# Altium PCB edison_breakout.PcbDoc (part 2 of 2)
Units mil, origin at the board's own origin, x right, y up, seen from the top; angles counter-clockwise.
Board outline 3250 x 2250 mil, 6 copper layers (Top Layer, Signal Layer 1, Signal Layer 3, Signal Layer 4, Signal Layer 2, Bottom Layer), stack 48.468 mil thick; 195 components, 178 nets, 869 pads, 172 vias.
Unrouted connection lines stored in the file: 453.
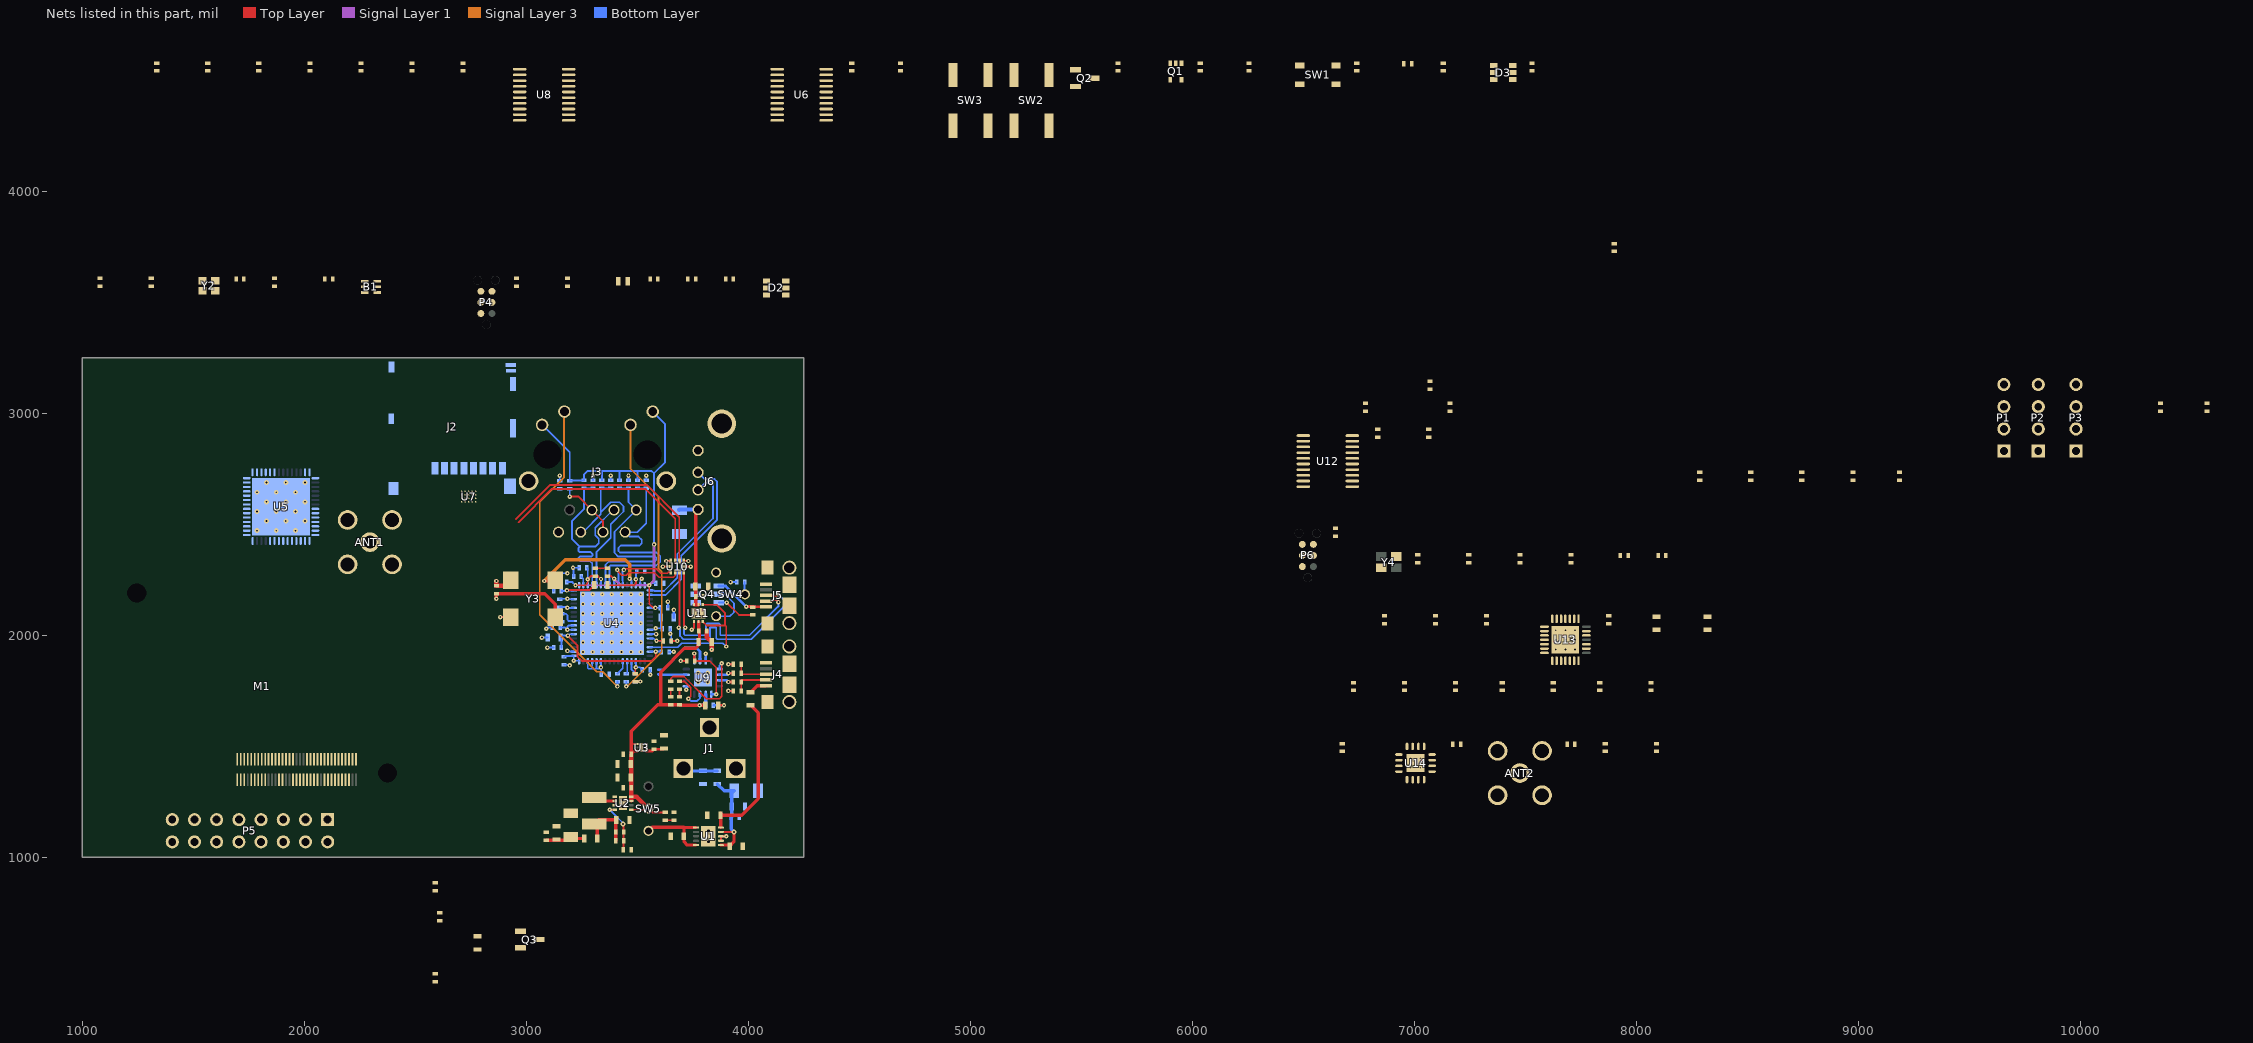
[diagram p4: the nets of this part, all layers, seen from the top]

## Part data
ANT1 ANT2: "CONN SMA JACK STR 50 OHM PCB"
B1: "2.45 GHz Balun for TI CC253X"
C1 C9 C25 C67 C80: library part C_4.7u_10V_0603_ceramic, "Ceramic capacitor, 4.7u, 10V, 0603 package"
C2 C5 C8 C10 C12 C14 C15 C17 C72 C75 C77: library part C_10u_10V_0603_ceramic, "Ceramic capacitor, 10 uF, 10 V, 0603 package"
C3: library part C_10p_50V_0402_ceramic, "Ceramic capacitor, 10 pF, 16 V, 0402 package"
C4 C16 C73: library part C_100u_10V_1206_tantalum, "Tantalum capacitor, 100 uF, 10 V, 1206 package"
C6 C7 C11 C13 C18 C28 C71 C74 C76 C84: library part C_1u_16V_0402_ceramic, "Ceramic capacitor, 1 uF, 16V, 0402 package"
C19 C20 C21 C22 C23 C24 C26 C27 C29 C30 C31 C32 C33 C34 C35 C36 C37 C38 C39 C40 C41 C42 C43 C44 C45 C46 C52 C53 C54 C55 C56 C57 C58 C59 C66 C68 C79 C81 C85 C86 C91: library part C_0.1u_16V_0402_ceramic, "Ceramic capacitor, 0.1u, 16 V, 0402 package"
C47 C48: library part C_22p_0402_ceramic, "Ceramic capacitor, 22 pF, 0402 package"
C49 C83: library part C_1000p_50V_0402_ceramic, "Ceramic capacitor, 1000 pF, 0402 package"
C50 C51 C82: library part C_12p_0402_ceramic, "Ceramic capacitor, 12 pF, 0402 package"
C60: library part C_10000p_16V_0402_ceramic, "Ceramic capacitor, 10000 pF, 16 V, 0402 package"
C61: library part C_0.022u_50V_0402_ceramic, "Ceramic capacitor, 0.022 uF, 0402 package"
C62 C63 C64 C65 C92 C93: library part C_15p_25V_0402_ceramic, "Ceramic capacitor, 15 pF, 25V, 0402 package"
C69 C70: library part C_47p_50V_0402_ceramic, "Ceramic capacitor, 47 pF, 0402 package"
C78: library part C_220p_50V_0402_ceramic, "Ceramic capacitor, 220 pF, 0402 package"
C87: library part C_18p_50V_0402_ceramic, "Ceramic capacitor, 18 pF, 0402 package"
C88 C89: library part C_2.2p_50V_0402_ceramic, "Ceramic capacitor, 2.2 pF, 0402 package"
C90: library part C_0.2p_50V_0402_ceramic, "Ceramic capacitor, 0.2 pF, 0402 package"
D1: library part D_LED_BLUE_0402, "LED, Blue, 0402"
D2 D3: library part D_CLY6D-FKC, "CREE PLCC6 3 in 1 SMD LED"
D4: library part D_LED_ORANGE_0402, "LED, Orange, 0402"
D5: library part D_LED_GREEN_0402, "LED, Green,  0402"
D6: library part D_LED_RED_0402, "LED, Red, 0402"
FB1 FB2 FB3 FB4 FB5 FB6: library part FB_2A_0603, "Ferrite Bead, 2 A, 0603 package"
J1: "CONN PWR JACK 2.1X5.5MM HIGH CUR"
J2: "Micro SD Slot"
J3: "1x1 Tab-Down RJ45"
J4 J5: library part "Micro USB", "CONN USB MICRO B RECPT SMT R/A"
J6: library part A105221-ND, "USB 2.0 Type A"
L1: library part L_1u_LQM32PN, "Chip inductor, 1 uH, 1210 package, LQM32PN"
L2: library part L_4.7n_300mA_0402, "Chip inductor, 4.7 nH, 0402 package, 300 mA"
L3: library part L_6.8n_0402, "Chip inductor, 6.8 nH, 0402 package"
L4: library part L_1n_300mA_0402, "Chip inductor, 1 nH, 0402 package, 300 mA"
L5: library part L_2n_300mA_0402, "Chip inductor, 2 nH, 0402 package, 300 mA"
P1 P2 P3 P5: "100 mils standard header"
P4 P6: "TC2030-MCP-NL"
Q1: "Common Source Dual N-Channel MOSFET"
Q2 Q3: "N-Channel 20 V (D-S) MOSFET"
Q4: "Load Switch"
R1 R5 R13 R15 R34: library part R_200_0402, "Chip resistor, 200, 0402 package"
R2: library part R_680K_0402, "Chip resistor, 680K, 0402 package"
R3: library part R_120K_0402, "Chip resistor, 120K, 0402 package"
R4 R12: library part R_100_0402, "Chip resistor, 100, 0402 package"
R6 R14 R25 R27 R28: library part R_330_0402, "Chip resistor, 330, 0402 package"
R7: library part R_2.2K_0402, "Chip resistor, 2.2K, 0402 package"
R8 R42: library part R_56K_0402, "Chip resistor, 56K, 0402 package"
R9 R10 R11 R16 R17 R19 R26 R33 R35 R36 R38 R39 R40: library part R_10K_0402, "Chip resistor, 10K, 0402 package"
R18: library part R_12.4K_0402, "Chip resistor, 12.4K, 0402 package"
R20 R21 R22 R23: library part R_49.9_0402, "Chip resistor, 49.9, 0402 package"
R24: library part R_10_0402, "Chip resistor, 10, 0402 package"
R29 R32: library part R_27_0402, "Chip resistor, 27, 0402 package"
R30: library part R_470_0402, "Chip resistor, 470, 0402 package"
R31: library part R_750_0402, "Chip resistor, 750, 0402 package"
R37: library part R_12K_0402, "Chip resistor, 12K, 0402 package"
R41: library part R_3.9K_0402, "Chip resistor, 3.9K, 0402 package"
SW1: "Tactile Switches"
SW2 SW3: "Tactile SPST Switch"
SW4: "SPST Slide switch"
SW5: "Slide switch, SPDT, 500 mA, 12 V"
U1: "Dual 2.6A, 2.5V to 5.5V,  Ideal Diodes in 3mm ⊙ 3mm DFN"
U2: "3-MHz, 2-A, Step-Down Converter"
U3: "Fast Transient Response  Low Voltage 500 mA LDO"
U4: "USB 2.0 Hub and 10/100  Ethernet Controller"
U5: "A Powerful System-On-Chip for 2.4-GHz IEEE 802.15.4, 6LoWPAN  and ZigBee Applications"
U6 U8 U12: "TXS0108E-Q1 8-Bit Bi-directional, Level-Shifting, Voltage Translator  for Open-Drain and Push-Pull Applications"
U7: "SD CARD VOLTAGE-TRANSLATION TRANSCEIVER"
U9: "FT230X USB UART"
U10: "High-Speed USB 2.0 (480-Mbps) 1:2 Multiplexer ¡V Demultiplexer  Switch With Single Enable"
U11: "0.5A SINGLE CHANNEL CURRENT-LIMITED  POWER SWITCH WITH OUTPUT DISCHARGE"
U13: "2.4 GHZ IEEE 802.15.4/ZIGBEER RF TRANSCEIVER"
U14: "2.4-GHz Range Extender"
Y1: "32768 Hz SMD Low profile crystal"
Y2: "MHz Range Crystal Unit"
Y3: "HCMOS/TTL Clock Oscillator"
Y4: "Crystal 32.0000MHz 10ppm 10pF 50 Ohm"

## Via types
v1: diameter 20, hole 8, Top Layer to Bottom Layer, 78 vias
v2: diameter 19.68, hole 7.87, Top Layer to Bottom Layer, 66 vias
v3: diameter 22, hole 8, Top Layer to Bottom Layer, 21 vias
v4: diameter 150, hole 125, Top Layer to Bottom Layer, 4 vias
v5: diameter 24, hole 12, Top Layer to Bottom Layer, 3 vias

## Nets (pads, with @x,y where several pads share a name; then routed paths per layer and width w, separated by ;. In a path a pad name is that pad's centre, name@x,y a point inside that pad or via, vN(x,y) a via of type N, cw(c..) or ccw(c..) an arc to the next point about the centre after c; other vN are vias at no path point)
BLD_CTRL: P4.5 U5.18
BLD_RX: P4.4 U5.16
BLD_TX: P4.3 U5.17
CC2520_RF_N: L3.1 U13.19 U14.2
CC2520_RF_P: L3.2 U13.17 U14.3
CC2538_PA3: P5.7 U5.19
CC2538_PA4: P5.9 U5.20
CC2538_PA5: P5.11 U5.21
CC2538_PA6: P5.13 U5.22
CC2538_PA7: P5.15 U5.23
CC2538_R\E\S\E\T\: P4.6 P6.3 R7.2
CC2538_RF_N: B1.3 U5.38
CC2538_RF_P: B1.4 U5.37
CC2538_TCK: P6.4 U5.47
CC2538_TDO: P6.6 U5.48
CC2538_TMS: P6.2 U5.46
EDISON_CLK: M1.55 U8.4
EDISON_CLK_3V3: P5.6 U5.12 U8.17 U13.28
EDISON_CS0: M1.53 U8.5
EDISON_CS0_3V3: U5.11 U8.16
EDISON_CS1: M1.51 U6.1
EDISON_CS1_3V3: P5.8 U6.20 U13.3
EDISON_GP14: M1.48 U8.7
EDISON_GP14_3V3: U5.8 U8.14
EDISON_GP15: M1.42
EDISON_GP19: M1.41 U12.3
EDISON_GP20: M1.43 U12.1
EDISON_GP41: M1.54 U12.4
EDISON_GP43: M1.56 U12.5
EDISON_GP44: M1.24 U8.6
EDISON_GP44_3V3: U5.9 U8.15
EDISON_GP45: M1.26 U6.7
EDISON_GP45_3V3: P5.1 U6.14
EDISON_GP46: M1.28 U6.8
EDISON_GP46_3V3: P5.3 U6.13
EDISON_GP47: M1.30 U6.9
EDISON_GP47_3V3: P5.5 U6.12
EDISON_GP48: M1.32 U12.7
EDISON_GP49: M1.34 U12.8
EDISON_GP165: M1.25
EDISON_GP183: M1.39 U12.6
EDISON_I2C_SCL: M1.45 U6.4
EDISON_I2C_SCL_3V3: P5.12 R17.2 U6.17
EDISON_I2C_SDA: M1.47 U6.3
EDISON_I2C_SDA_3V3: P5.10 R16.2 U6.18
EDISON_MISO: M1.59 U8.1
EDISON_MISO_3V3: P5.2 U5.14 U8.20 U13.1
EDISON_MOSI: M1.57 U8.3
EDISON_MOSI_3V3: P5.4 U5.13 U8.18 U13.2
EDISON_SD_C\D\: J2.9 M1.60 U7.B2
EDISON_SD_CLK: M1.58 U7.D2
EDISON_SD_CLK_FB: M1.44 U7.E2
EDISON_SD_CMD: M1.62 U7.C1
EDISON_SD_DAT0: M1.66 U7.D1
EDISON_SD_DAT1: M1.70 U7.E1
EDISON_SD_DAT2: M1.64 U7.A1
EDISON_SD_DAT3: M1.68 U7.B1
EDISON_SW1: M1.50 R9.2 SW2.1 SW2.3
EDISON_SW2: M1.52 R10.2 SW3.1 SW3.3
EDISON_UART_CTS: M1.65
EDISON_UART_RTS: M1.63
EDISON_UART_RX: M1.61 U6.6
EDISON_UART_RX_3V3: P5.16 U6.15
EDISON_UART_TX: M1.46 U6.5
EDISON_UART_TX_3V3: P5.14 U6.16
GND: ANT1.1 ANT2.1 B1.2 B1.5 B1.6 C1.2 C2.2 C4.2 C5.2 C6.2 C7.2 C8.2 C9.2 C10.2 C11.2 C12.2 C13.2 C14.2 C15.2 C16.2 C17.2 C18.2 C19.2 C20.2 C21.2 C22.2 C23.2 C24.2 C25.2 C26.2 C27.2 C28.2 C29.2 C30.2 C31.2 C32.2 C33.2 C34.2 C35.2 C36.2 C37.2 C38.2 C39.2 C40.2 C41.2 C42.2 C43.2 C44.2 C45.2 C46.2 C47.2 C48.2 C49.2 C50.1 C51.1 C52.2 C53.2 C54.2 C55.2 C56.2 C57.2 C58.2 C59.2 C60.2 C61.2 C62.2 C63.2 C64.2 C65.2 C66.2 C67.2 C68.2 C69.2 C70.2 C71.2 C72.2 C73.2 C74.2 C75.2 C76.2 C77.2 C78.2 C79.2 C80.2 C81.2 C82.2 C83.2 C84.2 C85.2 C86.2 C88.2 C89.2 C90.2 C91.2 C92.2 C93.2 D1.2 J1.2 J1.3 J2.6 J2.10 J2.11 J2.12 J2.13 J2.14 J2.15 J2.16 J3.8 J3.13 J3.14 J4.5 J4.6 J5.5 J5.6 J6.4 J6.5 J6.6 M1.1 M1.5 M1.9 M1.11 M1.13 M1.15 P3.1 P3.2 P3.3 P3.4 P4.2 P6.5 Q1.4 Q2.2 Q3.2 Q4.1 R3.2 R8.2 R18.1 R33.2 R36.2 R37.2 R41.2 R42.2 SW1.3 SW1.4 SW2.2 SW2.4 SW3.2 SW3.4 U1.2 U1.3 U1.11 U2.1 U2.3 U2.9 U3.3 U3.7 U4.34 U4.44 U4.65 U5.1 U5.57 U6.11 U7.C2 U7.C3 U8.8 U8.9 U8.11 U8.12 U8.13 U9.3 U9.13 U9.17 U10.5 U10.6 U11.1 U11.7 U12.9 U12.11 U12.12 U13.29 U14.1 U14.4 U14.9 U14.11 U14.12 U14.16 U14.17 Y2.2 Y2.4 Y3.2 | length 1479
  Top Layer w8: C41.2@3310,2302.72 3336.1,2302.72 ; 3335,2301.61 3336.1,2302.72 ; C45.2@3365,2302.72 3336.1,2302.72 ; v1(3745,2025) 3755.32,2035.32 U11.1@3755.32,2061.61
  Top Layer w10: v1(3695,1885) C66.2@3722.28,1885 ; U10.6@3709.53,2335 v1(3730,2335) ; U10.5@3713.86,2310 v1(3740,2310) ; C67.2@3864.53,1685 v1(3890,1685) ; U1.2@3876.1,1075.31 U1.3@3876.1,1095 v1(3900,1095) ; v1(3910,1750) C69.2@3932.28,1750 ; v1(3910,1870) C70.2@3932.28,1870
  Top Layer w15: v1(2865,2165) C59.2@2865,2187.28 3082.72,2187.28 3130,2140 Y3.2@3130,2082.32
  Top Layer w20: C74.2@3812.72,2020 3812.72,1991.81 C75.2@3834.53,1970 v1(3834.53,1935.47)
  Bottom Layer w8: v1(3070,1990) C25.2@3095.47,1990 ; v1(3090,2030) 3095,2035 C36.2@3117.28,2035 ; v1(3095,1945) C26.2@3122.28,1945 ; C29.2@3122.28,2200 3122.28,2215 C43.2@3147.28,2240 3147.28,2262.28 3165,2280 v1(3185,2280) ; C37.2@3150,2127.28 3182.72,2127.28 v1(3185,2125) 3186.1,2123.9 U4.44@3213.74,2123.9 ; C61.2@3150,2695.43 v1(3150,2720) ; C35.2@3170,1867.28 3192.72,1867.28 v1(3195,1865) ; v1(3185,1930) 3187.95,1927.05 U4.34@3213.74,1927.05 ; R18.1@3212.28,2265 3212.28,2302.72 v1(3210,2305) C44.2@3237.28,2305 ; C64.2@3300,2697.72 v1(3300,2720) ; C65.2@3380,2697.72 v1(3380,2720) ; C62.2@3460,2697.72 v1(3460,2720) ; C63.2@3540,2697.72 v1(3540,2720) ; v1(3557.72,1822.28) C33.2@3557.72,1845 ; C39.2@3637.72,2125 v1(3637.72,2152.28) ; C27.2@3642.72,1925 3661.77,1925 v1(3663.38,1926.62) v1@3666.62,1926.62 ; C40.2@3647.72,2030 v1(3647.72,2007.28) 3652.72,2002.28 C60.2@3652.72,1975
  Bottom Layer w10: v1(3720.2,1755.2) U9.13@3720.2,1771.61 ; Q4.1@3760,2144.17 Q4.1@3763.43,2147.6 ; U9.3@3807.8,1884.8 v1(3807.8,1917.8) ; C68.2@3842.72,1685 v1(3890,1685)
  other v2: 6983.35,1403.35 7026.65,1403.35 6983.35,1446.65 7026.65,1446.65 3773.35,1788.35 3816.65,1788.35 3773.35,1831.65 3816.65,1831.65 3255.08,1925.08 3298.39,1925.08 3341.69,1925.08 3385,1925.08 3428.31,1925.08 3471.61,1925.08 3514.92,1925.08 7636.69,1936.69 7680,1936.69 7723.31,1936.69 3255.08,1968.39 3298.39,1968.39 3341.69,1968.39 3385,1968.39 3428.31,1968.39 3471.61,1968.39 3514.92,1968.39 7636.69,1980 7680,1980 7723.31,1980 3255.08,2011.69 3298.39,2011.69 3341.69,2011.69 3385,2011.69 3428.31,2011.69 3471.61,2011.69 3514.92,2011.69 7636.69,2023.31 7680,2023.31 7723.31,2023.31 3255.08,2055 3298.39,2055 3341.69,2055 3385,2055 3428.31,2055 3471.61,2055 3514.92,2055 3255.08,2098.31 3298.39,2098.31 3341.69,2098.31 3385,2098.31 3428.31,2098.31 3471.61,2098.31 3514.92,2098.31 3255.08,2141.61 3298.39,2141.61 3341.69,2141.61 3385,2141.61 3428.31,2141.61 3471.61,2141.61 3514.92,2141.61 3255.08,2184.92 3298.39,2184.92 3341.69,2184.92 3385,2184.92 3428.31,2184.92 3471.61,2184.92 3514.92,2184.92
  other v3: 1786.73,2471.73 1873.35,2471.73 1959.96,2471.73 1830.04,2515.04 1916.65,2515.04 2003.27,2515.04 1786.73,2558.35 1873.35,2558.35 1959.96,2558.35 1830.04,2601.65 1916.65,2601.65 2003.27,2601.65 1786.73,2644.96 1873.35,2644.96 1959.96,2644.96 1830.04,2688.27 1916.65,2688.27 2003.27,2688.27
  other v5: 3820,1070 3820,1120 3775,2100
L\N\K\A\: R27.1 U4.21 | length 57.6
  Bottom Layer w8: R27.1@3450,1827.72 3453.9,1831.61 U4.21@3453.9,1883.74
LNA_EN: R39.1 U12.18 U13.5
NetANT1_2: ANT1.2 B1.1
NetANT2_2: ANT2.2 C87.2
NetC2_1: C2.1 C3.1 FB1.2 L1.1 R2.1 | length 250
  Top Layer w15: L1.1@3306,1149.96 3325.29,1169.25 C2.1@3405.47,1169.25 ; FB1.2@3319.53,1085 L1.1@3319.53,1136.43 ; C3.1@3402.28,1075 R2.1@3402.28,1115 C2.1@3402.28,1166.06
NetC3_2: C3.2 R2.2 R3.1 U2.4 | length 227.9
  Top Layer w8: v3(3375.28,1214.72) U2.4@3397.6,1214.72 ; v3(3435,1150) 3437.72,1147.28 R2.2@3437.72,1115 C3.2@3437.72,1075 R3.1@3437.72,1035
  Bottom Layer w8: v3(3375.28,1214.72) 3435,1155 v3(3435,1150)
NetC15_1: C15.1 FB2.2 J1.1 | length 157.4
  Bottom Layer w15: J1.1@3706.89,1400 3717.36,1389.53 C15.1@3795,1389.53 FB2.2@3860,1389.53
NetC19_1: C19.1 C20.1 U5.32 U5.56
NetC47_1: C47.1 U5.45 Y1.2
NetC48_1: C48.1 U5.44 Y1.1
NetC49_1: C49.1 R7.1 U5.28
NetC50_2: C50.2 U5.34 Y2.1
NetC51_2: C51.2 U5.35 Y2.3
NetC60_1: C60.1 R26.2 U4.12 | length 97.7
  Top Layer w8: v1(3586.18,1976.18) 3616.11,1976.18 R26.2@3617.28,1975
  Bottom Layer w8: U4.12@3556.57,1985.79 U4.12@3556.26,1986.1 3573.9,1986.1 3583.82,1976.18 v1(3586.18,1976.18) 3616.11,1976.18 C60.1@3617.28,1975
NetC61_1: C61.1 J3.4 J3.5 R24.2 | length 328.8
  Top Layer w8: v1(3195,2625) 3235,2625 J3.5@3295,2565 3345,2515 J3.4@3345,2465
  Bottom Layer w8: C61.1@3152.28,2657.72 C61.1@3150,2660 R24.2@3195,2660 v1(3195,2625)
NetC69_1: C69.1 J4.2 R29.1 | length 161.4
  Top Layer w8: C69.1@3967.72,1750 R29.1@3967.72,1790 3967.72,1799.41 J4.2@4079.68,1799.41
NetC70_1: C70.1 J4.3 R32.1 | length 157
  Top Layer w8: C70.1@3967.72,1870 R32.1@3967.72,1830 3967.72,1825 J4.3@4079.68,1825
NetC87_1: C87.1 C90.1 L5.1
NetC88_1: C88.1 L2.2 L4.2 U14.10
NetC89_1: C89.1 L4.1 L5.2
NetC91_1: C91.1 U13.27
NetC92_1: C92.1 U13.12 Y4.1
NetC93_1: C93.1 U13.13 Y4.3
NetD1_1: D1.1 R1.2 | length 40
  Top Layer w8: R1.2@3625,1167.28 D1.1@3665,1167.28
NetD2_1: D2.1 R4.1
NetD2_2: D2.2 R5.1
NetD2_3: D2.3 R6.2
NetD3_1: D3.1 Q1.2
NetD3_2: D3.2 Q1.1
NetD3_3: D3.3 Q2.3
NetD3_4: D3.4 R14.1
NetD3_5: D3.5 R13.1
NetD3_6: D3.6 R12.1
NetD4_2: D4.2 R25.1 | length 45.4
  Top Layer w8: D4.2@3490,1792.28 v1(3512.72,1792.28)
  Bottom Layer w8: R25.1@3490,1792.28 v1(3512.72,1792.28)
NetD5_1: D5.1 R30.2 | length 34.6
  Top Layer w8: R30.2@3690,1722.72 D5.1@3690,1757.28
NetD5_2: D5.2 U9.11 | length 194.5
  Top Layer w8: D5.2@3690,1792.72 3711.16,1792.72 3740.2,1763.68 3740.2,1725.2 v1(3730,1715)
  Bottom Layer w8: v1(3730,1715) 3740,1705 3770,1705 3782.2,1717.2 U9.11@3782.2,1735.2
NetD6_1: D6.1 R31.2 | length 34.6
  Top Layer w8: R31.2@3650,1722.72 D6.1@3650,1757.28
NetD6_2: D6.2 U9.5 | length 472.8
  Top Layer w8: D6.2@3650,1792.72 3650,1805 3660,1815 3710,1815 3810,1715 3870,1715 3880,1725 v1(3880,1875)
  Bottom Layer w8: U9.5@3869.8,1848.39 3869.8,1864.8 v1(3880,1875)
NetFB5_2: FB5.2 J4.1 | length 81.8
  Top Layer w15: FB5.2@4010,1744.53 4039.29,1773.82 J4.1@4079.68,1773.82
NetJ2_1: J2.1 U7.A4
NetJ2_2: J2.2 U7.B4
NetJ2_3: J2.3 U7.C4
NetJ2_5: J2.5 U7.D3
NetJ2_7: J2.7 U7.D4
NetJ2_8: J2.8 U7.E4
NetJ3_10: J3.10 R27.2 | length 1327.5
  Signal Layer 3 w8: v1(3450,1770) 3454.19,1770 3610,1925.81 3610,2286.72 3595,2301.72 3595,2625 3469.02,2750.98 J3.10@3469.02,2948.07
  Bottom Layer w8: v1(3450,1770) R27.2@3450,1792.28
NetJ3_11: J3.11 R28.2 | length 1467.5
  Signal Layer 3 w8: J3.11@3170.98,3007.91 3170,3006.93 3170,2711.72 3060,2601.72 3060,2092.1 3316.31,1835.79 3344.21,1835.79 v1(3410,1770)
  Bottom Layer w8: v1(3410,1770) R28.2@3410,1792.28
NetJ5_1: J5.1 Q4.4 R35.2 | length 251.9
  Top Layer w12: v1(3990,2130) 4025,2130 4026.18,2128.82 J5.1@4079.68,2128.82
  Bottom Layer w12: Q4.4@3866.57,2222.4 3897.6,2222.4 v1(3990,2130)
NetL1_2: L1.2 U2.2 | length 98.2
  Top Layer w15: L1.2@3306,1270.04 3321.94,1254.09 U2.2@3397.6,1254.09
NetM1_3: M1.3 Q3.3
NetM1_17: M1.17 R15.1
NetM1_20: M1.20 Q4.2 Q4.3
NetM1_22: M1.22 U9.15 | length 126.1
  Bottom Layer w12: 3595,1825 3597.2,1822.8 U9.15@3720.2,1822.8
NetM1_27: M1.27 U9.2 | length 278.7
  Bottom Layer w12: 3595,1845 3615,1845 3715,1945 3765,1945 3782.2,1927.8 U9.2@3782.2,1884.8
NetM1_33: M1.33 Q1.5
NetM1_35: M1.35 Q1.3
NetM1_37: M1.37 Q2.1
NetQ3_1: Q3.1 R33.1 SW4.2
NetQ4_6: Q4.6 R35.1 | length 176.3
  Top Layer w8: v1(3902.4,2147.6) 3957.72,2092.28 R35.1@4020,2092.28
  Bottom Layer w8: Q4.6@3866.57,2147.6 v1(3902.4,2147.6)
NetR4_2: R4.2 U5.29
NetR5_2: R5.2 U5.30
NetR6_1: R6.1 U5.31
NetR8_1: R8.1 U5.42
NetR11_2: R11.2 R15.2 SW1.1 SW1.2
NetR18_2: R18.2 U4.50 | length 42.6
  Bottom Layer w8: R18.2@3247.72,2265 3256.42,2256.3 3256.42,2226.89 U4.50@3257.05,2226.26
NetR19_2: R19.2 U4.41 | length 79.1
  Bottom Layer w8: R19.2@3160,2097.72 3177.28,2097.72 3185,2090 3185,2070 3190.16,2064.84 U4.41@3213.74,2064.84
NetR25_2: R25.2 U4.20 | length 63.1
  Bottom Layer w8: U4.20@3473.58,1883.74 3473.27,1883.43 3473.27,1848.13 3490,1831.4 R25.2@3490,1827.72
NetR29_2: R29.2 U9.7 | length 65.5
  Top Layer w12: v1(3910,1790) R29.2@3932.28,1790
  Bottom Layer w12: U9.7@3869.8,1797.2 3902.8,1797.2 v1(3910,1790)
NetR32_2: R32.2 U9.6 | length 65.5
  Top Layer w12: v1(3910,1830) R32.2@3932.28,1830
  Bottom Layer w12: U9.6@3869.8,1822.8 3902.8,1822.8 v1(3910,1830)
NetR34_1: R34.1 SW4.C | length 55.9
  Bottom Layer w8: R34.1@3982.72,2240 3982.72,2187.24 SW4.C@3984.96,2185
NetR37_1: R37.1 U4.63 | length 31.7
  Bottom Layer w8: U4.63@3512.95,2226.26 3513.27,2226.57 3513.27,2248.27 v1(3520,2255)
NetR38_2: R38.2 U14.5
NetR39_2: R39.2 U14.6
NetR40_2: R40.2 U14.7
NetR41_1: R41.1 U14.8
NetR42_1: R42.1 U13.23
NetU4_61: U4.61 Y3.3 | length 581
  Top Layer w15: v1(3080,2245) 3127.32,2245 Y3.3@3130,2247.68
  Signal Layer 3 w15: v1(3080,2245) 3175,2340 3445,2340 3465,2320 v1(3465,2255)
  Bottom Layer w8: v1(3465,2255) 3473.27,2246.73 3473.27,2226.57 U4.61@3473.58,2226.26
NetU12_13: U12.13 U13.25
NetU12_14: U12.14 U13.10
NetU12_15: U12.15 U13.9
NetU12_16: U12.16 U13.7
NetU12_17: U12.17 U13.6
PA_EN: R38.1 U12.20 U13.4
RX_N: C65.1 J3.6 R23.2 U4.53 | length 827.5
  Bottom Layer w8: J3.6@3245,2465 3255,2465 3335,2545 ; U4.53@3316.1,2226.26 3316.1,2374.42 3315.26,2375.26 3379.8,2439.8 3379.8,2500.58 3437.46,2558.24 3437.46,2582 3419.46,2600 3380.78,2600 3335,2554.22 3335,2545 ; C65.1@3380,2662.72 3340.43,2662.72 R23.2@3340,2662.28 3335,2657.28 3335,2545
RX_P: C64.1 J3.3 R22.2 U4.52 | length 965.2
  Bottom Layer w8: U4.52@3296.42,2226.26 3296.42,2324.16 3285.57,2335 3240,2335 3235,2340 3235,2350 3240,2355 3292.26,2355 3297.26,2360 3297.26,2367.74 3290,2375 3240,2375 3235,2380 3235,2395 3240,2400 ; C64.1@3300,2662.72 3260.43,2662.72 R22.2@3260,2662.28 3260,2570 3205,2515 3205,2435 3240,2400 ; J3.3@3395,2565 3390,2565 3310.2,2485.2 3310.2,2450.58 3325.78,2435 3325.78,2415.78 3310,2400 3240,2400
S\P\D\: R28.1 U4.22 | length 66.1
  Bottom Layer w8: R28.1@3410,1827.72 3434.21,1851.93 U4.22@3434.21,1883.74
TX_N: C63.1 J3.2 R21.2 U4.56 | length 1086.6
  Bottom Layer w8: U4.56@3375.16,2226.26 3375.16,2245.02 3374.32,2245.87 3374.32,2310 3379.32,2315 3585.46,2315 3603,2332.54 3603,2357.46 3587.46,2373 3422,2373 3415,2380 3415,2395 3425,2405 3510,2405 3520,2415 3520,2430 3505,2445 3465,2445 J3.2@3445,2465 3500,2465 3540,2505 C63.1@3540,2662.28 C63.1@3539.57,2662.28 ; R21.2@3500,2662.28 C63.1@3539.57,2662.28 ; C63.1@3540,2662.72 C63.1@3539.57,2662.28
TX_P: C62.1 J3.1 R20.2 U4.55 | length 922.5
  Bottom Layer w8: U4.55@3355.47,2226.26 3355.47,2245.02 3356.32,2245.87 3356.32,2317.46 3371.86,2333 3578,2333 3585,2340 3585,2350 3580,2355 3414.54,2355 3397,2372.54 3397,2467 J3.1@3495,2565 3460,2600 3460,2661.85 C62.1@3459.57,2662.28 ; R20.2@3420,2662.28 C62.1@3459.57,2662.28 ; C62.1@3460,2662.28 C62.1@3459.57,2662.28 ; C62.1@3460,2662.72 C62.1@3459.57,2662.28
USB2_PWR: C73.1 C76.1 C77.1 J6.1 U11.5 U11.6 | length 547.7
  Top Layer w15: J6.1@3773.31,2567.05 3759.53,2553.27 3763.5,2549.3 3763.5,2223.97 3759.53,2220 3762.72,2216.81 3762.72,2170 3762.72,2145.79 U11.6@3755.32,2138.39 U11.5@3775,2138.39
  Bottom Layer w20: C73.1@3688.15,2565 3690.2,2567.05 J6.1@3773.31,2567.05
USB2_PWR_EN: U4.14 U11.3 U11.4 | length 733.2
  Top Layer w8: U11.3@3794.68,2061.61 3811.3,2045 3895,2045 ; U11.4@3794.68,2138.39 3856.61,2138.39 3895,2100 3895,2045 ; v1(3900,1950) 3900,2040 3895,2045
  Bottom Layer w8: U4.14@3556.26,1946.73 3556.26,1947.05 3682.05,1947.05 3700,1965 3885,1965 v1(3900,1950)
USB_DOWNSTREAM_N: J6.2 U4.1 | length 721.2
  Bottom Layer w8: U4.1@3556.26,2202.64 3575.02,2202.64 3577.66,2200 3620,2200 3680,2260 3680,2366.41 3840,2526.41 3840,2686 3803.68,2686 J6.2@3773.31,2655.63
USB_DOWNSTREAM_P: J6.3 U4.2 | length 780.2
  Bottom Layer w8: U4.2@3556.26,2182.95 3569.25,2182.95 3570.21,2182 3627.46,2182 3698,2252.54 3698,2358.96 3858,2518.96 3858,2693.46 3847.46,2704 3803.68,2704 J6.3@3773.31,2734.37
USB_EDISON_N: M1.18 U10.7 | length 1059.1
  Top Layer w8: 2952.27,2522.73 3107.54,2678 3543.46,2678 3689,2532.46 3689,2351.26 3689.84,2350.42 U10.7@3689.84,2335
USB_EDISON_P: M1.16 U10.8 | length 1014.4
  Top Layer w8: 2965,2510 3115,2660 3536,2660 3671,2525 3671,2351.26 3670.16,2350.42 U10.8@3670.16,2335
USB_MASTER/SLAVE_SEL: Q4.5 R36.1 SW4.1 U10.9 | length 240.1
  Top Layer w8: v1(3630,2335) U10.9@3650.47,2335
  Bottom Layer w8: v1(3630,2335) v1@3635,2330 ; SW4.1@3855.04,2086.57 3916.57,2086.57 3935,2105 3935,2145 3895,2185 Q4.5@3866.57,2185
USB_SLAVE_N: J5.2 U10.4 | length 952.2
  Top Layer w8: U10.4@3709.53,2285 3709.53,2045.41 3716,2038.94 v1(3716,2035) ; J5.2@4079.68,2154.41 4110.26,2154.41 4114.06,2158.2 4126.8,2158.2 v1(4135,2150) v1@4135,2155
  Bottom Layer w8: v1(3716,2035) 3710,2029 3710,2005 3714.77,2000.23 3809,2000.23 3809,2048.67 3814.27,2053.94 3867.73,2053.94 3873,2048.67 3873,2000.23 4004.77,2000.23 4135,2130.46 v1(4135,2150)
USB_SLAVE_P: J5.3 U10.3 | length 1053.4
  Top Layer w8: v1(3686,2035) 3689.84,2038.84 U10.3@3689.84,2285 ; J5.3@4079.68,2180 4110.26,2180 4114.06,2176.2 4126.2,2176.2 v1(4135,2185)
  Bottom Layer w8: v1(3686,2035) 3692,2029 3692,1997.54 3707.32,1982.23 3714.77,1982.23 3821.73,1982.23 3827,1987.5 3827,2035.94 3855,2035.94 3855,1987.5 3860.27,1982.23 4012.23,1982.23 4159,2129 4159,2159.94 4135,2183.94 v1(4135,2185)
USB_UPSTREAM_N: U4.58 U10.2 | length 376.2
  Top Layer w8: v1(3409.37,2295) 3409.37,2291.06 3429.43,2271 3449.31,2271 3460.58,2282.27 3577.27,2282.27 3597.54,2262 3635.57,2262 3662.57,2262 3670.16,2269.58 U10.2@3670.16,2285
  Bottom Layer w8: v1(3409.37,2295) 3415.37,2289 3415.37,2245.87 3414.53,2245.02 U4.58@3414.53,2226.26
USB_UPSTREAM_P: U4.59 U10.1 | length 295.3
  Top Layer w8: v1(3439.37,2295) 3444.64,2300.27 3460.58,2300.27 3584.73,2300.27 3605,2280 3635.57,2280 3640.57,2285 U10.1@3650.47,2285
  Bottom Layer w8: U4.59@3434.21,2226.26 3434.21,2245.02 3433.37,2245.87 3433.37,2289 v1(3439.37,2295)
V_ORED: C10.1 SW5.3 U1.6 U1.10 | length 344.5
  Top Layer w15: SW5.3@3550,1120 3565.47,1135.47 3710,1135.47 3710,1070 3724.37,1055.63 U1.10@3763.9,1055.63 ; 3711.1,1134.37 U1.6@3763.9,1134.37
VCC1.8_EDISON: C38.1 C52.1 C53.1 C54.1 C66.1 M1.12 P1.3 P1.4 R9.1 R10.1 U6.2 U6.10 U7.A2 U7.E3 U8.2 U8.10 U9.1 U9.9 U12.2 U12.10 | length 318.3
  Top Layer w8: C66.1@3757.72,1885 3825,1885 3854.8,1855.2 v1(3854.8,1735.2)
  Top Layer w12: v1(3756.61,1918.39) 3756.61,1886.1 C66.1@3757.72,1885
  Bottom Layer w12: U9.1@3756.61,1884.8 v1(3756.61,1918.39) ; U9.9@3833.39,1735.2 v1(3854.8,1735.2)
VCC3.3: C13.1 C14.1 C21.1 C22.1 C23.1 C24.1 C30.1 C31.1 C32.1 C33.1 C34.1 C35.1 C36.1 C37.1 C46.1 C55.1 C56.1 C57.1 C58.1 C59.1 C71.1 C72.1 C78.1 C79.1 C82.1 C83.1 C84.1 D2.4 D2.5 D2.6 D4.1 FB3.2 FB6.2 J2.4 L2.1 P2.1 P2.2 P2.3 P2.4 R11.1 R12.2 R13.2 R14.2 R16.1 R17.1 R19.1 R26.1 R34.2 R40.1 U3.1 U3.2 U4.11 U4.19 U4.27 U4.28 U4.29 U4.30 U4.32 U4.33 U4.39 U4.40 U4.46 U5.10 U5.15 U5.24 U5.33 U5.36 U5.39 U5.40 U5.41 U5.43 U5.55 U6.19 U7.B3 U8.19 U10.10 U12.19 U14.13 U14.14 U14.15 Y3.1 Y3.4 | length 1000.1
  Top Layer w8: v1(2882.68,2082.32) Y3.1@2930,2082.32 ; D4.1@3490,1827.72 3490,1853.46 v1(3493.27,1856.73) ; U3.1@3540.67,1479.25 U3.2@3540.67,1495 ; v1(3615,2310) U10.10@3646.14,2310 ; R26.1@3652.72,1975 v1(3680,1975)
  Top Layer w12: U3.1@3540.67,1479.25 3566.97,1479.25 C13.1@3575,1487.28 3616.81,1487.28 C14.1@3620,1490.47
  Top Layer w20: v1(2865,2245) C59.1@2865,2222.72 2905.04,2222.72 Y3.4@2930,2247.68
  Bottom Layer w8: C37.1@3150,2162.72 3152.28,2165 v1(3185,2165) 3186.73,2163.27 U4.46@3213.74,2163.27 ; R19.1@3160,2062.28 3152.72,2055 C36.1@3152.72,2035 3175,2035 v1(3185,2025) ; C35.1@3170,1902.72 3174.65,1907.36 U4.33@3213.74,1907.36 v1(3213.74,1886.26) 3234.84,1886.26 U4.32@3237.36,1883.74 ; U4.39@3213.74,2025.47 3185.47,2025.47 v1(3185,2025) ; U4.40@3213.74,2045.16 3190.16,2045.16 3185,2040 v1(3185,2025) ; U4.30@3276.73,1883.74 3276.73,1853.27 3280,1850 3330,1850 v1(3335.79,1855.79) ; 3296.42,1851.42 U4.29@3296.42,1883.74 ; 3316.1,1851.1 U4.28@3316.1,1883.74 ; U4.27@3335.79,1883.74 v1(3335.79,1855.79) ; C34.1@3337.28,1825 3337.28,1854.29 v1(3335.79,1855.79) ; U4.19@3493.27,1883.74 v1(3493.27,1856.73) 3510.55,1856.73 C33.1@3522.28,1845 ; U4.11@3556.26,2005.79 v1(3584.21,2005.79) ; v1(3920,2240) R34.2@3947.28,2240
  Bottom Layer w12: FB3.2@3664.53,2080 v1(3664.53,2114.53)
VCC3.3_2520: C80.1 C81.1 C85.1 C86.1 FB6.1 U13.8 U13.11 U13.14 U13.16 U13.20 U13.22 U13.24 U13.26
VCC3.3_EDISON: M1.8 M1.10
VCC3.3A: C39.1 C40.1 C41.1 C42.1 C43.1 C44.1 C45.1 FB3.1 J3.9 J3.12 R20.1 R21.1 R22.1 R23.1 R24.1 U4.5 U4.10 U4.49 U4.51 U4.54 U4.57 U4.64 | length 2819.3
  Top Layer w8: v1(3221.26,2226.26) 3266.26,2226.26 3276.42,2236.42 v1(3276.42,2253.27) 3290.43,2267.28 C41.1@3310,2267.28 3322.76,2267.28 v1(3336.1,2253.94) ; C45.1@3365,2267.28 3382.72,2267.28 v1(3395,2255) ; v1(3553.74,2226.26) 3553.74,2141.26 3571.1,2123.9 v1(3581.1,2123.9)
  Signal Layer 1 w8: v1(3221.26,2226.26) 3423.74,2226.26
  Signal Layer 1 w12: v1(3395,2255) 3423.74,2226.26 v1(3553.74,2226.26) 3575,2247.52 v1(3575,2410)
  Bottom Layer w8: J3.12@3070.98,2948.07 3195,2824.06 R24.1@3195,2695.43 3197.28,2697.72 R22.1@3260,2697.72 3260,2725 3275,2740 3340,2740 ; C43.1@3182.72,2240 3207.52,2240 v1(3221.26,2226.26) U4.49@3237.36,2226.26 ; C44.1@3272.72,2305 3276.42,2301.3 v1(3276.42,2253.27) 3276.73,2252.95 U4.51@3276.73,2226.26 ; U4.54@3335.79,2226.26 3335.79,2253.62 v1(3336.1,2253.94) v1@3338.94,2253.94 ; R23.1@3340,2697.72 3340,2740 ; U4.57@3394.84,2226.26 3395,2226.42 v1(3395,2255) ; R20.1@3420,2697.72 3420,2740 ; R21.1@3500,2697.72 3500,2740 ; U4.64@3532.64,2226.26 v1(3553.74,2226.26) 3562.48,2235 C42.1@3582.28,2235 ; U4.10@3556.26,2025.47 3556.57,2025.79 3576.56,2025.79 v1(3582.56,2031.79) 3605.5,2031.79 C40.1@3612.28,2025 ; U4.5@3556.26,2123.9 v1(3581.1,2123.9) 3582.2,2125 C39.1@3602.28,2125 3605.47,2121.81 FB3.1@3605.47,2080 3605.47,2036.81 C40.1@3612.28,2030 ; J3.9@3569.02,3007.91 3625,2951.93 3625,2780 3575,2730 ; v1(3575,2410) 3575,2730 ; 3340,2740 3420,2740 ; 3420,2740 3500,2740 ; 3500,2740 3565,2740 3575,2730
VDD1.8_ETH_CORE: C25.1 C26.1 C27.1 U4.15 U4.38 | length 664
  Top Layer w8: v1(3186.96,1999) 3230,1955.96 3230,1905 3250,1885 3565,1885 3582.95,1902.95 v1(3582.95,1927.05)
  Bottom Layer w8: C25.1@3154.53,1990 3163.53,1999 v1(3186.96,1999) 3192.96,2005 3212.95,2005 U4.38@3213.74,2005.79 ; C26.1@3157.72,1945 C25.1@3157.72,1986.81 ; U4.15@3556.26,1927.05 v1(3582.95,1927.05) 3605.24,1927.05 C27.1@3607.28,1925
VDD1.8_ETH_ETH_PLL: C29.1 FB4.1 U4.48 | length 190.5
  Top Layer w8: v1(3182.64,2202.64) 3184.76,2204.76 3284.76,2204.76 FB4.1@3306.26,2226.26
  Bottom Layer w8: C29.1@3157.72,2200 3180,2200 v1(3182.64,2202.64) U4.48@3213.74,2202.64
VDD1.8_ETH_USB_PLL: C28.1 FB4.2 U4.62 | length 216.3
  Top Layer w8: FB4.2@3365.32,2226.26 3486.26,2226.26 3493.27,2233.27 v1(3493.27,2253.27)
  Bottom Layer w8: U4.62@3493.27,2226.26 v1(3493.27,2253.27) 3493.27,2285.98 C28.1@3497.28,2290
VEXT_IN: C1.1 C16.1 C17.1 C18.1 FB2.1 U1.1 U1.4 | length 463.1
  Top Layer w8: U1.4@3876.1,1114.68 3876.1,1115 v3(3935,1115)
  Top Layer w15: U1.1@3876.1,1055.63 3915.47,1055.63 C1.1@3915.47,1050 3935,1069.53 v3(3935,1115)
  Bottom Layer w15: FB2.1@3860,1330.47 3890.47,1300 C16.1@3936.85,1300 3925.47,1288.62 C17.1@3925.47,1230 3925.47,1183.19 C18.1@3922.28,1180 3922.28,1127.72 v3(3935,1115)
VSELECTED: C7.1 C8.1 C11.1 C12.1 C67.1 C68.1 C74.1 C75.1 P1.1 P1.2 R1.1 R30.1 R31.1 SW5.1 U2.5 U2.7 U2.8 U3.4 U3.6 U9.10 U11.2 | length 1578.3
  Top Layer w8: U2.5@3472.4,1214.72 3544.72,1214.72 SW5.1@3550,1220 3567.28,1202.72 R1.1@3625,1202.72 ; 3472.72,1502.72 3480.75,1510.75 U3.4@3499.33,1510.75
  Top Layer w12: C11.1@3472.72,1465 3486.97,1479.25 U3.6@3499.33,1479.25
  Top Layer w15: C11.1@3472.72,1465 3472.72,1502.72 3472.72,1567.72 3592.28,1687.28 3605,1687.28 ; R30.1@3690,1685 v1(3780,1685) C67.1@3805.47,1685 ; R30.1@3690,1687.28 R31.1@3650,1687.28 3605,1687.28 ; U11.2@3775,2061.61 3776.26,2060.35 3776.26,2021.02 C74.1@3777.28,2020 ; C74.1@3777.72,2025 3779.53,2023.19 3779.53,1959.53 3761.89,1941.89 3711.89,1941.89 3605,1835 3605,1687.28
  Top Layer w20: U2.8@3472.4,1273.78 U2.8@3472.72,1273.78 ; U2.7@3472.72,1256.24 U2.8@3472.72,1273.78 ; C11.1@3472.72,1465 C7.1@3472.72,1314.25 U2.8@3472.72,1273.78 ; SW5.1@3550,1220 3496.22,1273.78 U2.8@3472.72,1273.78
  Bottom Layer w15: v1(3780,1685) C68.1@3807.28,1685 3807.8,1685.51 U9.10@3807.8,1735.2
VSYS: C4.1 C5.1 C6.1 FB1.1 M1.2 M1.4 M1.6 M1.14 | length 169.7
  Top Layer w15: C6.1@3090,1077.28 3185.43,1077.28 C4.1@3200,1091.85 ; C4.1@3206.85,1085 FB1.1@3260.47,1085
VUSB_IN: C9.1 FB5.1 U1.5 | length 696.9
  Top Layer w15: C9.1@3874.53,1190 3876.1,1188.43 U1.5@3876.1,1134.37 ; C9.1@3874.53,1200 3884.53,1190 3970,1190 4045,1265 4045,1650.47 FB5.1@4010,1685.47
pads on no net: J3. J3.7 J4.4 J5.4 M1. M1.7 M1.19 M1.21 M1.23 M1.29 M1.31 M1.36 M1.38 M1.40 M1.49 M1.67 M1.69 P4.0 P4.1 P6.0 P6.1 SW5.2 U1.7 U1.8 U1.9 U2.6 U3.5 U4.3 U4.4 U4.6 U4.7 U4.8 U4.9 U4.13 U4.16 U4.17 U4.18 U4.23 U4.24 U4.25 U4.26 U4.31 U4.35 U4.36 U4.37 U4.42 U4.43 U4.45 U4.47 U4.60 U5.2 U5.3 U5.4 U5.5 U5.6 U5.7 U5.25 U5.26 U5.27 U5.49 U5.50 U5.51 U5.52 U5.53 U5.54 U7.A3 U9.4 U9.8 U9.12 U9.14 U9.16 U13.15 U13.18 U13.21 Y4.2 Y4.4
copper on no net:
  other v4: 1125,1125 4125,1125 1125,3125 4125,3125

## Polygon pours and split planes (outlines as drawn)
VCC3.3 on Top Layer "Bottom Layer-No Net" (solid, pour order 2): 3650,1510 3650,1350 3495,1350 3485,1350 3485,1465 3555,1465 3555,1510

## Keep-outs
Keep-Out Layer:
  the board outline again, w5